# Altium PCB Control.PcbDoc
Units mm, origin at the board's own origin, x right, y up, seen from the top; angles counter-clockwise.
Board outline 70 x 100 mm, 2 copper layers (Top Layer, Bottom Layer); 47 components, 68 nets, 243 pads, 49 vias.
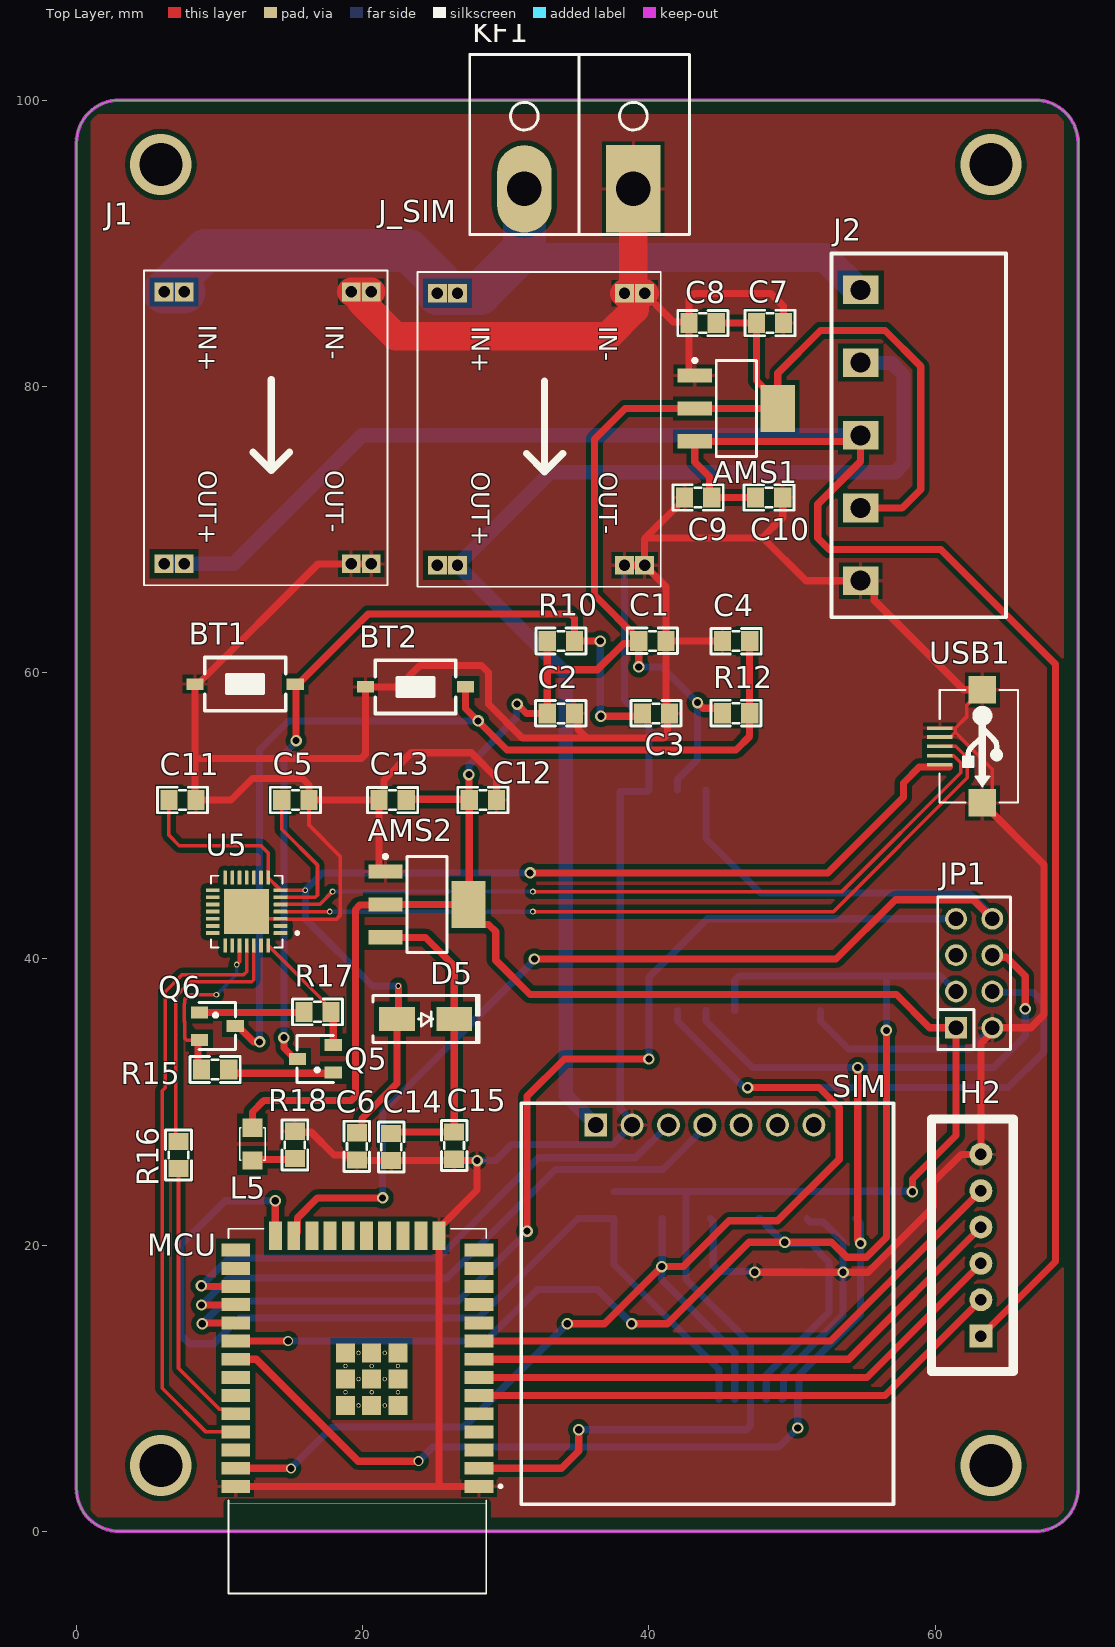
[diagram p0: Top Layer view]
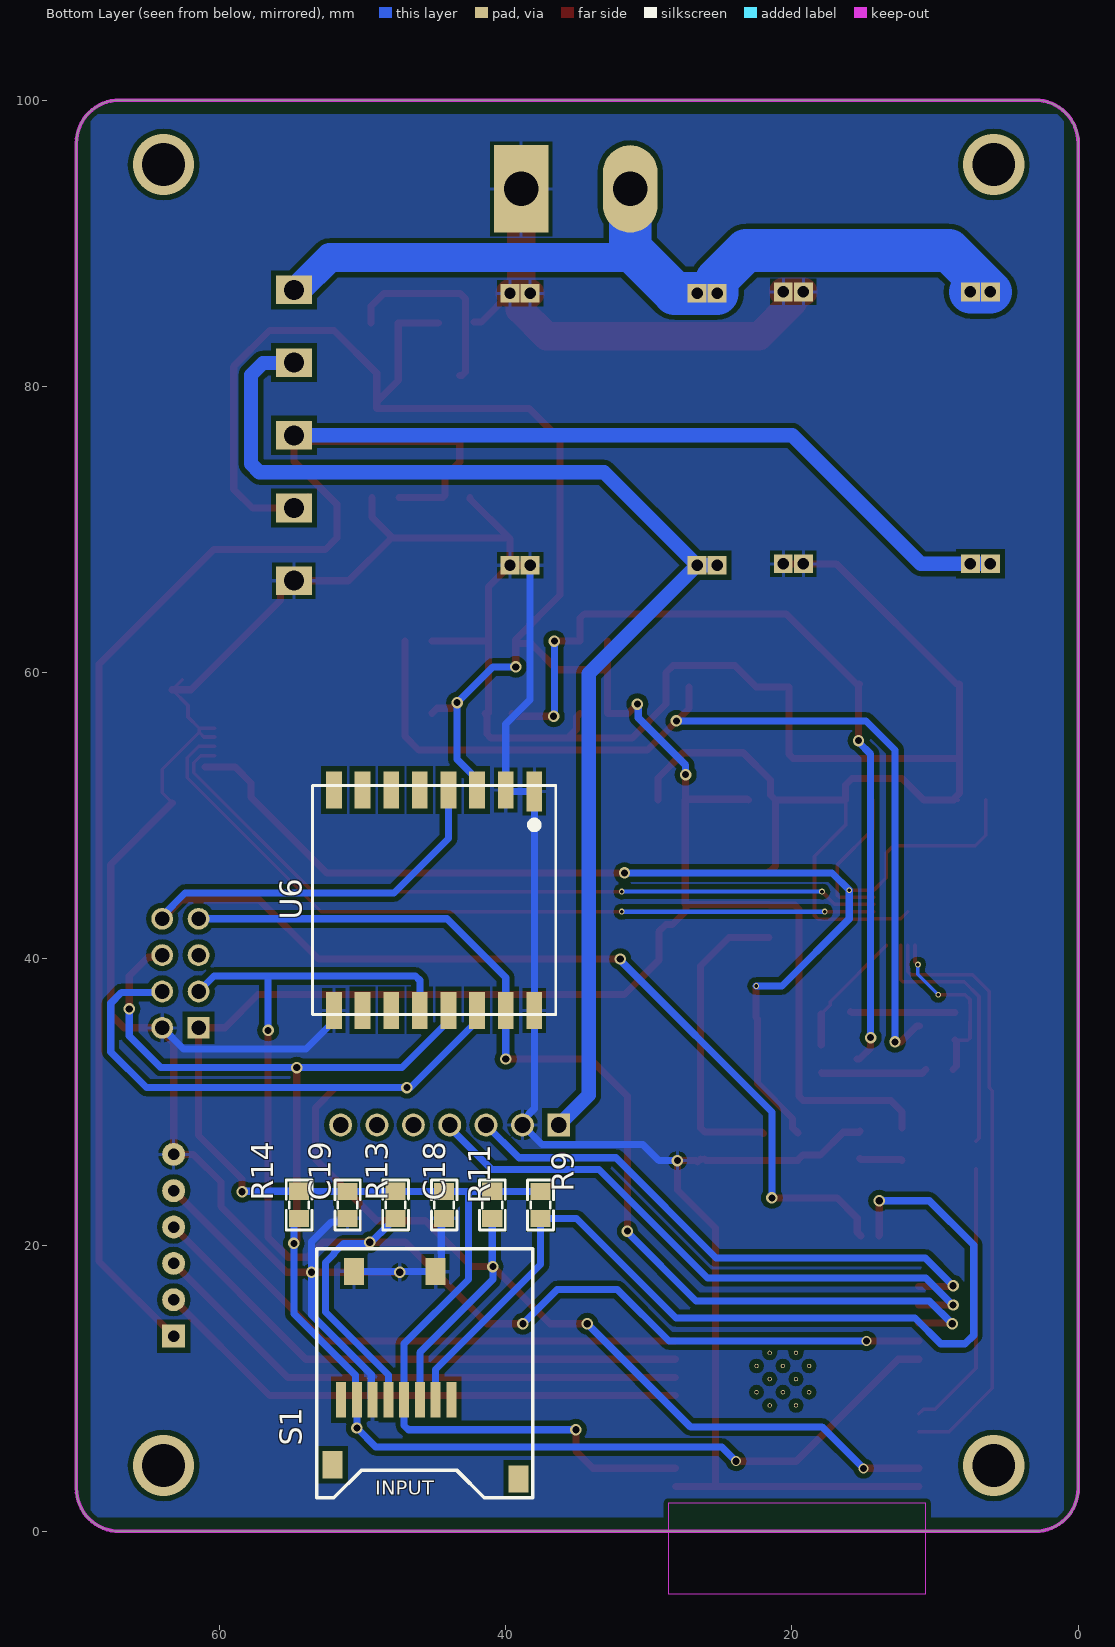
[diagram p1: Bottom Layer view, seen from below]

## Layer stack, top to bottom
Top Solder: solder mask 0.0102, Solder Resist, Dk 3.5
Top Layer: signal copper 0.0356
Dielectric 1: dielectric 0.32, FR-4, Dk 4.8
Bottom Layer: signal copper 0.0356
Bottom Solder: solder mask 0.0102, Solder Resist, Dk 3.5

## Board outline
0,3 ccw(c3,3) 3,0 67,0 ccw(c67,3) 70,3 70,97 ccw(c67,97) 67,100 3,100 ccw(c3,97) 0,97

## Design rules (kind name [scope] priority, off if disabled: settings)
Clearance [All] p1: gap=0.35 ignorepadtopadclearanceinfootprint=FALSE
PolygonConnect [All] p1: connectstyle=Relief reliefconductorwidth=0.254 reliefentries=4 polygonreliefangle="90 Angle" airgapwidth=0.254
RoutingVias [All] p1: holewidth=1.5 width=1.77 viastyle="Through Hole" minholewidth=1 minwidth=1.27 maxholewidth=2.5 maxwidth=2.7
SolderMaskExpansion [All] p1: expansion=0.102 istentingtop=FALSE
Width [All] p1: maxlimit=3 minlimit=0.2 preferedwidth=0.5
30 further rules are at their usual default settings.

## Classes and differential pairs
component class SIM: SIM
component class SD: C18 C19 R9 R11 R13 R14 S1
component class RF: JP1 U6
component class Power: AMS1 C7 C8 C9 C10 J1 J2 J_SIM KF1
component class MCU: AMS2 BT1 BT2 C1 C2 C3 C4 C5 C6 C11 C12 C13 C14 C15 D5 L5 MCU Q5 Q6 R10 R12 R15 R16 R17 R18 U5 USB1
component class Relay: H2

## Components (designator, comment, footprint, x,y, rotation, side; value= is the part's Value field where it differs from the comment)
AMS1 "AMS1117-3.3V" SOT223 46.112,78.457 r270 top value="AMS1117-3.3V SOT223"
AMS2 "AMS1117-3.3V" SOT223 24.5,43.8 r270 top value="AMS1117-3.3V SOT223"
BT1 "Nut Nhan 2 Chan SMD 3x6x2.5" "Nut Nhan 2 Chan SMD 3x6x2.5" 11.8,59.2 r180 top
BT2 "Nut Nhan 2 Chan SMD 3x6x2.5" "Nut Nhan 2 Chan SMD 3x6x2.5" 23.7,59 r180 top
C1 "104" "tu 0805" 40.246,62.215 r0 top
C2 "106" "tu 0805" 33.846,57.151 r0 top
C3 "106" "tu 0805" 40.5,57.151 r0 top
C4 "106" "tu 0805" 46.1,62.2 r180 top
C5 "105" "tu 0805" 15.3,51.1 r0 top
C6 "105" "tu 0805" 19.6,26.9 r270 top
C7 "106" "tu 0805" 48.46,84.429 r0 top
C8 "104" "tu 0805" 43.769,84.423 r180 top
C9 "106" "tu 0805" 43.445,72.234 r180 top
C10 "104" "tu 0805" 48.398,72.234 r0 top
C11 "105" "tu 0805" 7.413,51.1 r0 top
C12 "106" "tu 0805" 28.4,51.1 r0 top
C13 "104" "tu 0805" 22.1,51.093 r180 top
C14 "106" "tu 0805" 22.003,26.854 r270 top
C15 "104" "tu 0805" 26.403,26.954 r270 top
C18 "104" "tu 0805" 44.3,22.8 r270 bottom
C19 "104" "tu 0805" 51.049,22.8 r270 bottom
D5 "SS34" "DIODE SMA" 24.4,35.8 r0 top
H2 "Header 6P 2.54 Duc Thang" XH2.54M-6 63.2,13.64 r90 top
J1 "MP1584" DC-BRICK 4.73,88.1 r270 top
J2 "CON 5 EDG5.08" "CON 5 5EDG5.08" 54.8,86.74 r270 top
J_SIM "MP1584" DC-BRICK 23.83,88 r270 top
JP1 "JP 2x4 2.54" "JP 2x4 CT" 62.73,38.99 r90 top
KF1 "CON 2 KF7.62" "CON 2 KF7.62" 38.869,93.8 r180 top
L5 "LED 0805" LED-0805-Red 12.3,28.2 r270 top
MCU "ESP32 WROOM 32" ESP32-WROOM-32D 19.635,8.395 r180 top
Q5 "BC817" SOT-23 16.7,33 r90 top value=C9014
Q6 "BC817" SOT-23 9.85,35.305 r270 top value=C9014
R9 "1k" "tro smd 0805" 37.5,22.803 r270 bottom
R10 "10k" "tro smd 0805" 33.854,62.139 r180 top
R11 "1k" "tro smd 0805" 41.002,22.803 r90 bottom
R12 "10k" "tro smd 0805" 46.1,57.1 r180 top
R13 "1k" "tro smd 0805" 47.751,22.803 r90 bottom
R14 "1k" "tro smd 0805" 54.5,22.803 r90 bottom
R15 "10k" "tro smd 0805" 9.7,32.2 r180 top
R16 "470R" "Tro SMD 0805" 7.2,26.3 r270 top
R17 "10k" "tro smd 0805" 16.846,36.361 r0 top
R18 "10k" "tro smd 0805" 15.2,27 r90 top
S1 "Micro SD card TF5" "MicroSD TF V5" 48.3,9.254 r180 bottom
SIM "Module SIMA7670C" "Module sim7670C" 43.7,15.3 r180 top
U5 "CP2102" QFN50P500X500X100-29N 11.9,43.3 r180 top
U6 "RA-02" RA-02 45,44.1 r270 bottom
USB1 "USB Micro 5p SMD" "USB Micro 5p SMD" 60.332,54.85 r270 top

## Footprints (in the part's own frame and the unit in brackets; to place one, negate y for a bottom-side part, rotate by r counter-clockwise, add the part's x,y. Pads: shape width x height; smd on the part's side, far side on the other; paste and mask are expansions set on the pad)
"CON 2 KF7.62" [mil]
  rect 150x240 hole 95: 1(-2,0)
  oval 150x240 hole 95: 2(298,0)
  silkscreen extent -157,-370 448,126, body extent -152,-370 448,122, height 493
"CON 5 5EDG5.08" [mm]
  rect 2x2.5 hole 1.4: 1(0,0) 2(5.08,0) 3(10.16,0) 4(15.24,0) 5(20.32,0)
  silkscreen extent -2.54,-2.03 22.86,10.16, body extent -2.5,-1.75 22.82,10.25, height 3.15
DC-BRICK [mm]
  rect 1.308x1.308 / inner round 1.308 / far side rect 1.308x1.308 hole 0.8: IN1+(1.5,1.4) IN1-(1.5,14.47) IN2+(1.5,2.8) IN2-(1.5,15.87) OUT1+(20.5,1.4) OUT1-(20.5,14.47) OUT2+(20.5,2.8) OUT2-(20.5,15.87)
  silkscreen extent 0,0 22,17, body extent -2.45,-3 2.45,3, height 1.7
"DIODE SMA" [mm] "SMA"
  rect 2.5x1.7 smd: 1(-2,0) 2(2,0)
  silkscreen extent -3.68,-1.65 3.75,1.65, body extent -2.6,-1.37 2.6,1.37, height 2.4
ESP32-WROOM-32D [mm]
  rect 2x0.9 smd: 1(-8.5,5.26) 2(-8.5,3.99) 3(-8.5,2.72) 4(-8.5,1.45) 5(-8.5,0.18) 6(-8.5,-1.09) 7(-8.5,-2.36) 8(-8.5,-3.63) 9(-8.5,-4.9) 10(-8.5,-6.17) 11(-8.5,-7.44) 12(-8.5,-8.71) 13(-8.5,-9.98) 14(-8.5,-11.25) 25(8.5,-11.25) 26(8.5,-9.98) 27(8.5,-8.71) 28(8.5,-7.44) 29(8.5,-6.17) 30(8.5,-4.9) 31(8.5,-3.63) 32(8.5,-2.36) 33(8.5,-1.09) 34(8.5,0.18) 35(8.5,1.45) 36(8.5,2.72) 37(8.5,3.99) 38(8.5,5.26)
  rect 0.9x2 smd: 15(-5.715,-12.25) 16(-4.445,-12.25) 17(-3.175,-12.25) 18(-1.905,-12.25) 19(-0.635,-12.25) 20(0.635,-12.25) 21(1.905,-12.25) 22(3.175,-12.25) 23(4.445,-12.25) 24(5.715,-12.25)
  round 0.3 hole 0.2: 39(-2.835,-1.322) 39(-2.835,-3.157) 39(-1.917,-0.405) 39(-1.917,-4.075) 39(-1.917,-2.24) 39(-1,-1.322) 39(-1,-3.157) 39(-0.082,-0.405) 39(-0.082,-2.24) 39(-0.082,-4.075) 39(0.835,-1.322) 39(0.835,-3.157)
  rect 1.33x1.33 smd: 39(-2.835,-0.405) 39(-2.835,-4.075) 39(-2.835,-2.24) 39(-1,-0.405) 39(-1,-2.24) 39(-1,-4.075) 39(0.835,-0.405) 39(0.835,-2.24) 39(0.835,-4.075)
  Keep-Out Layer region: 9,6.45 -9,6.45 -9,12.75 9,12.75
  Keep-Out Layer region: 9,6.45 -9,6.45 -9,12.75 9,12.75
  silkscreen extent -10.1,-12.75 9,12.75, body extent -9,-12.62 9,12.88, height 3.2
"JP 2x4 CT" [mm] "8 pins, dual row, straight, gold plating"
  rect 1.52x1.52 hole 1.02: 1(-3.81,1.27)
  round 1.52 hole 1.02: 2(-1.27,1.27) 3(1.27,1.27) 4(3.81,1.27) 5(3.81,-1.27) 6(1.27,-1.27) 7(-1.27,-1.27) 8(-3.81,-1.27)
  silkscreen extent -5.33,-2.54 5.33,2.54, body extent -5.33,-2.54 5.33,2.54, height 8.51
LED-0805-Red [mil]
  rect 50x55 smd: 1(0,0) 2(90,0)
  silkscreen extent 0,-35 90,35, body extent 5,-25 85,25, height 43
"MicroSD TF V5" [mm]
  rect 1.4x1.9 smd: 0(-3.8,-4.6) 0(9.2,-5.6) 9(-2.3,8.9) 10(3.4,8.9)
  rect 0.7x2.5 smd: 1(4.5,-0.054) 2(3.4,-0.054) 3(2.3,-0.054) 4(1.2,-0.054) 5(0.1,-0.054) 6(-1,-0.054) 7(-2.1,-0.054) 8(-3.2,-0.054)
  silkscreen extent -4.9,-6.91 10.2,10.5, body extent -4.35,-5.54 9.75,9.66, height 2
"Module sim7670C" [mm]
  rect 1.6x1.6 hole 1.1: 1(7.408,-13.095)
  round 1.6 hole 1.1: 2(4.868,-13.095) 3(2.328,-13.095) 4(-0.212,-13.095) 5(-2.752,-13.095) 6(-5.292,-13.095) 7(-7.832,-13.095)
  silkscreen extent -13.39,-14.6 12.61,13.4, body extent -13.39,-14.6 12.61,13.4, height 12.24
"Nut Nhan 2 Chan SMD 3x6x2.5" [mm] "Switch SMD type"
  rect 1.2x0.8 smd: 1(-3.5,0) 2(3.5,0)
  silkscreen extent -2.82,-1.85 2.82,1.85, body extent -3.05,-1.85 3.05,1.85, height 2.5
QFN50P500X500X100-29N [mm]
  rrect25% 0.97x0.26 smd: 1(-2.37,1.5) 2(-2.37,1) 3(-2.37,0.5) 4(-2.37,0) 5(-2.37,-0.5) 6(-2.37,-1) 7(-2.37,-1.5) 15(2.37,-1.5) 16(2.37,-1) 17(2.37,-0.5) 18(2.37,0) 19(2.37,0.5) 20(2.37,1) 21(2.37,1.5)
  rrect25% 0.26x0.97 smd: 8(-1.5,-2.37) 9(-1,-2.37) 10(-0.5,-2.37) 11(0,-2.37) 12(0.5,-2.37) 13(1,-2.37) 14(1.5,-2.37) 22(1.5,2.37) 23(1,2.37) 24(0.5,2.37) 25(0,2.37) 26(-0.5,2.37) 27(-1,2.37) 28(-1.5,2.37)
  rect 3.15x3.15 smd paste-0.575: 29(0,0)
  silkscreen extent -3.64,-2.5 2.5,2.5
RA-02 [mm]
  rect 2.8x1.1 smd: 1(-7.6,7)
  rect 2.6x1.1 smd: 2(-7.7,5) 3(-7.7,3) 4(-7.7,1) 5(-7.7,-1) 6(-7.7,-3) 7(-7.7,-5) 8(-7.7,-7) 9(7.7,-7) 10(7.7,-5) 11(7.7,-3) 12(7.7,-1) 13(7.7,1) 14(7.7,3) 15(7.7,5) 16(7.7,7)
  silkscreen extent -8,-8.5 8,8.5
SOT223 [mm]
  rect 1x2.4 smd: 1(-2.3,-2.9) 2(0,-2.9) 3(2.3,-2.9)
  rect 3.3x2.4 smd: 4(0,2.9)
  silkscreen extent -3.47,-3.02 3.35,1.4, body extent -3.25,-3.56 3.25,3.4, height 1.68
SOT-23 [mm] "SOT 23 _ 1-3-2"
  rect 0.85x1.2 smd: 1(-0.94,-1.245) 2(0.985,-1.25) 3(0.005,1.25)
  silkscreen extent -1.65,-1.27 1.65,1.27, body extent -1.47,-1.33 1.53,1.17, height 1.06
"tro smd 0805" [mm]
  rect 1.2x1.4 smd: 1(-0.946,-0.061) 2(0.954,-0.061)
  silkscreen extent -1.75,-0.97 1.75,0.84, body extent -1.56,-0.76 1.44,0.64, height 0.53
"Tro SMD 0805" [mm]
  rect 1.2x1.4 smd: 1(-0.946,-0.061) 2(0.954,-0.061)
  silkscreen extent -1.75,-0.97 1.75,0.84, body extent -1.56,-0.76 1.44,0.64, height 0.53
"tu 0805" [mm] "Compoment SMD 80x50mil"
  rect 1.2x1.4 smd: 1(-0.946,-0.003) 2(0.954,-0.003)
  silkscreen extent -1.75,-0.89 1.75,0.89, body extent -1.01,-0.64 1.01,0.63, height 0.61
"USB Micro 5p SMD" [mil]
  rect 10x70 smd: 1(51.18,0) 2(25.59,0) 3(0,0) 4(-25.59,0) 5(-50,0)
  rect 74.8x74.8 smd: 5(-155.51,116.84) 5(155.51,116.84)
  silkscreen extent -155,-1 155,215, body extent -157,5 158,218, height 107
XH2.54M-6 [mm]
  rect 1.6x1.6 hole 0.8: 1(0,0)
  round 1.6 hole 0.8: 2(2.54,0) 3(5.08,0) 4(7.62,0) 5(10.16,0) 6(12.7,0)
  silkscreen extent -2.48,-2.26 15.18,3.46, body extent -2.48,-2.26 15.18,3.48, height 6.91

## Part data
AMS1 AMS2: library part "AMS1117 SMD", "Dán", Chung_Loai=Dán, Don_Vi=Con, Ma_Hang=MH000596
C1 C8 C10 C13 C15 C18 C19: library part "Tu 0805 104 50V 10%", "Dán", Chung_Loai=Dán, Don_Vi=Con, Ma_Hang=MH004551, So_Chan=2, Ten_Linh_Kien="Tụ 0805 104-100nF 10% 50V"
C2 C3 C4 C7 C9 C12 C14: library part "Tu 0805 106 16V 10%", "Dán", Chung_Loai=Dán, Don_Vi=Con, Ma_Hang=MH004553, So_Chan=2, Ten_Linh_Kien="Tụ 0805 106-10uF 10% 16V"
C5 C6 C11: library part "Tu 0805 105 50V 10%", "Dán", Chung_Loai=Dán, Don_Vi=Con, Ma_Hang=MH004552, So_Chan=2, Ten_Linh_Kien="Tụ 0805 105-1uF 10% 50V"
D5: library part "Diode SS34 ( 1N5822 )", "Dán", Chung_Loai=Dán, Don_Vi=Con, Ma_Hang=MH002104, Ten_Linh_Kien="Diode SS34 3A 40V SMA ( 1N5822 SS34A)"
H2 J2 KF1: "Cắm", Chung_Loai=Cắm, Don_Vi=Con
  H2: Ma_Hang=MH001972, Ten_Linh_Kien="Header 6P XH2.54-6P Đực Thẳng"
  J2: Ma_Hang=MH003589, Ten_Linh_Kien="CON 5 2EDG5.08-5P 5.08MM ( Xanh Cong)"
  KF1: Ma_Hang=MH002053, Ten_Linh_Kien="CON 2 KF7.62-2P 7.62MM (Đen Thẳng)"
J1 J_SIM: "Buck Switching Regulator IC Positive Adjustable 0.8V 1 Output 3A 8-SOIC (0.154, 3.90mm Width) Exposed Pad", Package="SOIC-8 Monolithic Power", Check_prices=https://www.snapeda.com/parts/MP1584/Monolithic+Power+Systems+Inc./view-part/?ref=eda, MF="Monolithic Power", MP=MP1584, SnapEDA_Link=https://www.snapeda.com/parts/MP1584/Monolithic+Power+Systems+Inc./view-part/?ref=snap
JP1: library part "JP 2x4 2.54 Cai Thang", "Cắm", Chung_Loai=Cắm, Don_Vi=Con, Ma_Hang=MH008647, Ten_Linh_Kien="Jump Đôi Cái 2.54MM 2x20P Thẳng"
L5: library part "LED 0805 Do", "Dán", Chung_Loai=Dán, Don_Vi=Con, Ma_Hang=MH000897, Ten_Linh_Kien="LED 0805 Màu Đỏ (Red)"
Q5 Q6: library part "Trans BC817", "SOT-23 - C8658"
R9 R11 R13 R14: library part "Tro 0805 1% 1k", "Dán", Chung_Loai=Dán, Don_Vi=Con, Ma_Hang=MH005468, So_Chan=2, Ten_Linh_Kien="Trở 0805 1% 1k"
R10 R12: library part "Tro 0805 5% 10k", "Dán", Chung_Loai=Dán, Don_Vi=Con, Ma_Hang=MH005239, So_Chan=2, Ten_Linh_Kien="Trở 0805 5% 10k"
R15 R17 R18: library part "Tro 0805 1% 10k", "Dán", Chung_Loai=Dán, Don_Vi=Con, Ma_Hang=MH005473, So_Chan=2, Ten_Linh_Kien="Trở 0805 1% 10k"
R16: library part "Tro 0805 5% 470R", "Dán", Chung_Loai=Dán, Don_Vi=Con, Ma_Hang=MH005341, So_Chan=2, Ten_Linh_Kien="Trở 0805 5% 470R"
U5: "CP2102N USB 2.0 to UART (RS232) Bridge Interface Evaluation Board", Package="WFQFN-20 Silicon Labs", Availability="In Stock", Check_prices=https://www.snapeda.com/parts/CP2102/Silicon+Labs/view-part/?ref=eda, MF="Silicon Labs", MP=CP2102, Price=None, Purchase-URL=https://pricing.snapeda.com/search/part/CP2102/?ref=eda, SnapEDA_Link=https://www.snapeda.com/parts/CP2102/Silicon+Labs/view-part/?ref=snap
U6: "General ISM < 1GHz LoRaâ„¢ Transceiver Module 410MHz ~ 525MHz Antenna Not Included, I-PEX Surface Mount", Package=None, Availability="Not in stock", Check_prices=https://www.snapeda.com/parts/RA-02/AI-Thinker/view-part/?ref=eda, MF=Ai-Thinker, MP=RA-02, Price=None, SnapEDA_Link=https://www.snapeda.com/parts/RA-02/AI-Thinker/view-part/?ref=snap
USB1: "USB Type B", Ma_Hang=MH001020, Ten="MicroUSB MK5P SMD"
BT1 BT2: Ma_Hang=MH001036, Ten="Nút Nhấn 2 Chân 3x6x2.5MM SMD"

## Via types
v1: diameter 0.8, hole 0.5, Top Layer to Bottom Layer, 34 vias
v2: diameter 0.4, hole 0.25, Top Layer to Bottom Layer, 8 vias
v3: diameter 4.27, hole 3, Top Layer to Bottom Layer, 4 vias
v4: diameter 0.7, hole 0.5, Top Layer to Bottom Layer, 3 vias

## Nets (pads, with @x,y where several pads share a name; then routed paths per layer and width w, separated by ;. In a path a pad name is that pad's centre, name@x,y a point inside that pad or via, vN(x,y) a via of type N, cw(c..) or ccw(c..) an arc to the next point about the centre after c; other vN are vias at no path point)
ACTIVE: U5.11
D_N: U5.5 USB1.2 | length 53.7
  Top Layer w0.25: U5.5 17,43.8 v2(17.9,44.7) ; v2(31.9,44.7) 53.5,44.7 61.8,53 61.8,53.7 61.302,54.198 60.334,54.198 USB1.2
  Bottom Layer w0.3: v2(17.9,44.7) v2(31.9,44.7)
D_P: U5.4 USB1.3 | length 55.5
  Top Layer w0.25: U5.4 v2(17.7,43.3) ; v2(31.9,43.3) 52.9,43.3 62.25,52.65 62.25,54.05 61.45,54.85 USB1.3
  Bottom Layer w0.3: v2(17.7,43.3) v2(31.9,43.3)
DTR: Q6.2 R15.2 U5.24 | length 12.5
  Top Layer w0.25: Q6.2 7.707,34.32 7.56,34.466 7.56,35.593 7.53,35.623 7.53,36.867 7.56,36.897 7.56,37.153 7.907,37.5 v2(9.786,37.5) ; v2(11.2,39.6) 11.4,39.8 U5.24
  Top Layer w0.5: Q6.2 8.5,34.22 8.5,32.506 R15.2
  Bottom Layer w0.25: v2(9.786,37.5) 11.2,38.914 v2(11.2,39.6)
EN: BT1.1 C3.1 Q5.3 R10.1 | length 60.4
  Top Layer w0.5: v1(14.5,34.5) 14.5,33.78 15.275,33.005 Q5.3 ; v1(15.35,55.25) 15.35,59.15 BT1.1 15.5,59.2 20.4,64.1 34.507,64.1 34.8,63.807 R10.1 v1(36.6,62.2) ; v1(36.65,56.95) 39.357,56.95 C3.1
  Bottom Layer w0.5: v1(14.5,34.5) 14.5,54.3 15.35,55.15 v1(15.35,55.25) ; v1(36.6,62.2) 36.6,57 v1(36.65,56.95)
GND: AMS1.1 AMS2.1 BT1.2 BT2.2 C1.2 C2.2 C3.2 C4.2 C5.2 C6.2 C7.2 C8.2 C9.2 C10.2 C11.2 C12.2 C13.2 C14.2 C15.2 C18.2 C19.2 H2.6 J1.IN1- J1.IN2- J1.OUT1- J1.OUT2- J2.5 J_SIM.IN1- J_SIM.IN2- J_SIM.OUT1- J_SIM.OUT2- JP1.8 KF1.1 MCU.1 MCU.15 MCU.38 R18.2 S1.6 S1.9 S1.10 SIM.2 U5.3 U5.29 U6.1 U6.2 U6.9 U6.16 USB1.4 USB1.5 | length 431.4
  Top Layer w0.25: C11.2 C11.2@8.668,51.097 ; U5.29 12.4,42.8 U5.3 14.275,42.795 14.694,42.795 14.714,42.775 18.175,42.775 18.425,43.025 18.425,47.175 16.254,49.346 C5.2 ; USB1.4 61.094,55.5 61.42,55.826 ; USB1.5@60.332,56.12 61.42,56.12 ; USB1.5@62.6,59.5 63.3,58.8 62.2,57.7 62.2,56.9 61.42,56.12 ; USB1.5@63.3,50.9 64,51.6 64,53.246 61.42,55.826 ; 61.42,55.826 61.42,56.12
  Top Layer w0.5: MCU.38 25.5,3.135 ; R18.2 15.333,27.882 16.418,27.882 18.004,26.296 19.247,26.296 C6.2 ; C6.2@19.597,25.9 C14.2 26,25.9 C15.2@26.1,26 ; J1.OUT2- J1.OUT1- 16.9,67.6 8.5,59.2 BT1.2 8.3,54 ; AMS2.1 21.521,46.1 21.146,46.475 C13.2 ; C15.2 26.6,25.8 26.7,25.9 v1(28,25.9) 28,23.845 25.35,21.195 MCU.15 25.35,3.285 25.5,3.135 ; MCU.1 25.5,3.135 ; C12.2 29.354,52.646 27.6,54.4 23.4,54.4 21.496,52.496 21.496,51.447 C13.2 ; C2.2 35.057,56.891 35.057,56.043 35.68,55.42 ; J_SIM.OUT1- J_SIM.OUT2- ; J_SIM.IN2- 41.7,84.5 42.2,84.5 ; C3.2 C3.2@41.353,57.047 ; C9.2 42.491,72.137 39.753,69.4 ; AMS1.1 43.065,80.757 42.815,81.007 C8.2 42.815,86.115 43.2,86.5 48.508,86.5 49.414,85.594 C7.2 ; C4.2 45.141,62.208 41.204,62.208 C1.2 ; v1(47.4,18.1) 53.5,18.1 55.316,18.1 59.9,22.684 59.9,24.4 61.84,26.34 H2.6 63.2,34.104 64,34.904 JP1.8 66.68,35.18 67.6,36.1 67.6,46.6 USB1.5@63.3,50.9 ; 47.95,69.45 50.98,66.42 54.995,66.42 55.745,65.67 55.745,65.055 62,58.8 USB1.5@63.3,58.8 ; C10.2 49.352,70.852 47.9,69.4 39.753,69.4 ; 8.3,54 8.3,51.564 8.668,51.197 8.668,51.097 10.797,51.097 12.3,52.6 15.8,52.6 16.254,52.146 C5.2 C13.2 ; 8.3,54 19.907,54 20.2,54.293 BT2.2 22.5,59 24,60.5 28.3,60.5 28.8,60 28.8,57.8 31.18,55.42 35.68,55.42 ; 35.68,55.42 41.007,55.42 41.3,55.713 41.3,56.993 C3.2@41.353,57.047 ; J_SIM.OUT2- 39.7,69.347 39.753,69.4 ; J_SIM.OUT2- 41.2,66 C1.2 ; C1.2 41.2,57.2 C3.2@41.353,57.047
  Top Layer w2: J1.IN1- J1.IN2- ; 19.9,85.9 22.3,83.5 37.128,83.5 39,85.372 39,85.8 J_SIM.IN1- ; J_SIM.IN1-@38.92,87.12 KF1.1 ; J_SIM.IN2-@39.2,86.5 J_SIM.IN2-
  Bottom Layer w0.5: v1(28,25.9) 29.3,25.9 30.425,27.025 37.462,27.025 SIM.2 38.832,28.693 38,29.525 U6.16 U6.1 39.9,51.7 U6.2 40,56.4 38.3,58.1 J_SIM.OUT1- ; C18.2 44.5,21.649 44.5,18.554 S1.10 S1.9 ; S1.6 49.4,9.3 49.4,10.962 53.57,15.132 v1(53.57,18.1) ; C19.2 51.282,21.616 52.184,21.616 53.57,20.23 53.57,18.239 v1@53.431,18.1 ; U6.9 52,35.65 53.95,33.7 62.52,33.7 JP1.8
IN1: H2.2 MCU.6 | length 37.8
  Top Layer w0.5: MCU.6 56.505,9.485 H2.2
IN2: H2.3 MCU.7 | length 38.4
  Top Layer w0.5: MCU.7 55.235,10.755 H2.3
IN3: H2.4 MCU.8 | length 38.9
  Top Layer w0.5: MCU.8 53.965,12.025 H2.4
IN4: H2.5 MCU.9 | length 39.4
  Top Layer w0.5: MCU.9 52.695,13.295 H2.5
IO0: BT2.1 C4.1 Q6.3 R12.1 | length 68.3
  Top Layer w0.5: Q6.3 11.275,35.3 12.375,34.2 v1(12.8,34.2) ; BT2.1 27.2,57.5 30.1,54.6 46.1,54.6 47.046,55.546 R12.1 C4.1
  Bottom Layer w0.5: v1(12.8,34.2) 12.8,54.6 14.825,56.625 v1(28.075,56.625)
JD_VCC: 
MISO: JP1.6 MCU.31 R14.1 S1.7 U6.13 | length 104.6
  Top Layer w0.5: MCU.31 12.575,12.025 19.7,4.9 v4(23.9,4.9) ; v1(54.6,32.4) 54.6,20.316 v1(54.8,20.116) ; JP1.6 64.148,40.112 64.988,40.112 66.3,38.8 v1(66.3,36.5)
  Bottom Layer w0.5: v4(23.9,4.9) 24.9,5.9 49.08,5.9 v1(50.4,7.22) S1.7 50.5,9.3 50.5,10.902 54.8,15.202 v1(54.8,20.116) 54.8,21.507 54.45,21.857 R14.1 ; U6.13 44,35.65 47.25,32.4 v1(54.6,32.4) 64.1,32.4 66.3,34.6 v1(66.3,36.5)
MOSI: JP1.7 MCU.37 R11.1 S1.3 U6.14 | length 113.3
  Top Layer w0.5: MCU.37 14.995,4.405 v4(15,4.4) ; v1(34.3,14.5) 36.9,14.5 v1(40.9,18.5) 42.4,18.5 45.6,21.7 49,21.7 53.3,26 53.3,29.6 51.9,31 v1(46.9,31)
  Bottom Layer w0.5: v4(15,4.4) 17.9,7.3 27.1,7.3 v1(34.3,14.5) ; v1(40.9,18.5) 40.9,17.6 46,12.5 S1.3 ; v1@40.941,18.333 R11.1 ; U6.14 42,35.65 46.65,31 65.1,31 67.6,33.5 67.6,36.9 66.858,37.642 64.078,37.642 JP1.7
NetAMS2_3: AMS2.3 C14.1 C15.1 D5.2 | length 21.5
  Top Layer w0.5: AMS2.3 24.4,41.5 26.4,39.5 D5.2 26.4,28.2 26.1,27.9 22.1,27.9 C14.1
NetC5_1: C5.1 U5.6 | length 10.3
  Top Layer w0.25: U5.6 16.7,44.3 16.846,44.446 16.846,46.554 14.354,49.046 C5.1
NetD1_1: 
NetD2_1: 
NetD3_1: 
NetD4_1: 
NetL1_1: 
NetL2_1: 
NetL3_1: 
NetL4_1: 
NetL5_2: L5.2 R18.1 | length 3
  Top Layer w0.5: L5.2 12.37,25.984 15.191,25.984 R18.1
NetMCU_33: MCU.33
NetMCU_36: MCU.36
NetP1_1: 
NetP1_2: 
NetP1_3: 
NetP2_1: 
NetP2_2: 
NetP2_3: 
NetP3_1: 
NetP3_2: 
NetP3_3: 
NetP4_1: 
NetP4_2: 
NetP4_3: 
NetQ1_1: 
NetQ2_1: 
NetQ3_1: 
NetQ4_1: 
NetQ5_1: Q5.1 R15.1 | length 7.4
  Top Layer w0.5: R15.1 10.896,32.01 17.895,32.01 Q5.1
NetQ6_1: Q6.1 R17.1 | length 7.3
  Top Layer w0.5: Q6.1 15.845,36.245 R17.1
NetR1_1: 
NetR2_1: 
NetR3_1: 
NetR4_1: 
NetR5_1: 
NetR6_1: 
NetR7_1: 
NetR8_1: 
NetR16_1: R16.1 U5.26 | length 18.6
  Top Layer w0.25: R16.1 6.93,27.454 6.93,37.372 7.959,38.4 12.259,38.4 12.405,38.546 U5.26@12.405,40.93
NSS: JP1.4 MCU.29 U6.15 | length 75.7
  Top Layer w0.5: v1(8.799,14.499) 8.865,14.565 MCU.29 ; v1(31.494,20.972) 31.494,30.394 34.1,33 v1(40,33)
  Bottom Layer w0.5: v1(8.799,14.499) 10.4,16.1 26.7,16.1 31.494,20.894 v1(31.494,20.972) ; v1(40,33) U6.15 40,38.7 44.1,42.8 JP1.4
RST: JP1.5 MCU.23 U6.4 | length 89.1
  Top Layer w0.5: MCU.23 15.44,20.895 15.44,21.881 16.859,23.3 v1(21.4,23.3) ; v1(32,39.988) 53.088,39.988 57.23,44.13 62.67,44.13 JP1.5
  Bottom Layer w0.5: v1(21.4,23.3) 21.4,29.3 32,39.9 v1(32,39.988) ; U6.4 44,48.4 47.8,44.6 62.4,44.6 64,43 JP1.5
RTS: Q5.2 R17.2 U5.28 | length 8.8
  Top Layer w0.25: U5.28 17.325,37.005 17.325,36.775 R17.2 R17.2@17.95,36.15
  Top Layer w0.5: Q5.2 R17.2@17.95,36.15
RX2: MCU.27 SIM.3 | length 39.7
  Top Layer w0.5: v1(8.74,17.16) 8.75,17.16 8.805,17.105 MCU.27
  Bottom Layer w0.5: v1(8.74,17.16) 10.681,19.1 25.3,19.1 32.3,26.1 39.076,26.1 SIM.3
SCK: JP1.2 MCU.30 R13.1 S1.5 U6.12 | length 105.3
  Top Layer w0.5: MCU.30 14.695,13.295 v4@14.7,13.3 ; v1(38.8,14.5) 41.3,14.5 47,20.2 v1(49.5,20.2) 52.772,20.2 53.826,19.146 55.202,19.146 56.6,20.544 v1(56.6,35)
  Bottom Layer w0.5: v4(14.8,13.3) 28.6,13.3 32.2,16.9 36.4,16.9 v1(38.8,14.5) ; U6.12 46,38.5 46.3,38.8 56.7,38.8 ; R13.1 47.79,21.857 48.14,21.507 48.14,21.46 49.5,20.1 51.338,20.1 52,19.438 52,19.383 52.6,18.783 52.6,15.321 48.2,10.921 S1.5 ; v1(56.6,35) 56.6,38.7 56.7,38.8 ; JP1.2 60.38,38.8 56.7,38.8
SDCS: MCU.24 R9.2 S1.2 | length 66.5
  Top Layer w0.5: v1(13.9,23.1) 13.9,20.665 MCU.24
  Bottom Layer w0.5: v1(13.9,23.1) 10.4,23.1 7.3,20 7.3,13.7 7.9,13.1 9.6,13.1 11.4,14.9 28.1,14.9 35.048,21.848 R9.2 37.561,18.639 44.9,11.3 S1.2
TX2: MCU.28 SIM.4 | length 42.9
  Top Layer w0.5: v1(8.743,15.815) 8.747,15.819 11.119,15.819 MCU.28
  Bottom Layer w0.5: v1(8.743,15.815) 8.767,15.815 10.653,17.7 25.9,17.7 33.48,25.28 40.98,25.28 43.912,28.212 SIM.4
U0RX: MCU.34 R16.2 | length 19.3
  Top Layer w0.25: R16.2 7.139,11.401 10.001,8.54 10.81,8.54 MCU.34
U0TX: MCU.35 U5.25 | length 42.3
  Top Layer w0.25: MCU.35 9.055,6.945 5.994,10.006 5.994,30.778 6.2,30.984 6.2,37.7 7.4,38.9 11.7,38.9 11.9,39.1 U5.25
V_SIM_7V: J2.2 J_SIM.OUT1+ J_SIM.OUT2+ SIM.1 | length 88.2
  Bottom Layer w1: J_SIM.OUT1+ J_SIM.OUT2+ ; SIM.1 34.2,30.487 34.2,59.93 J_SIM.OUT2+ ; J2.2 54.824,81.636 56.964,81.636 57.8,80.8 57.8,74.586 57.214,74 33.13,74 26.784,67.654 J_SIM.OUT2+
VCC: AMS1.3 C9.1 C10.1 H2.1 J1.OUT1+ J1.OUT2+ J2.3 | length 149.4
  Top Layer w0.5: C10.1 47.449,72.234 44.394,72.234 C9.1 44.236,72.392 44.236,73.687 43.212,74.711 AMS1.3 54.377,76.157 J2.3 54.8,74.765 51.8,71.765 51.8,69.4 52.6,68.6 60.4,68.6 68.42,60.58 68.42,18.86 H2.1
  Bottom Layer w1: J1.OUT1+ J1.OUT2+ 11,67.6 19.98,76.58 J2.3
VCC_3V3PW: AMS1.2 AMS1.4 AMS2.2 AMS2.4 C1.1 C2.1 C7.1 C8.1 C12.1 C13.1 C18.1 C19.1 J2.4 JP1.1 L5.1 MCU.2 R9.1 R10.2 R11.2 R12.2 R13.2 R14.2 S1.4 U6.3 | length 259.3
  Top Layer w0.5: L5.1 12.3,29.3 13.1,30.1 19.207,30.1 19.5,30.393 19.5,43.457 19.793,43.75 21.55,43.75 AMS2.2 AMS2.4 ; C13.1 23.097,51.148 27.348,51.148 27.427,51.227 v1(27.427,52.873) ; C12.1 27.454,43.854 AMS2.4 ; MCU.2 33.895,4.405 35.1,5.61 v1(35.1,7.1) ; v1(30.8,57.8) 31.453,57.147 C2.1 32.9,60.2 ; R10.2 32.9,60.2 ; v1(39.3,60.4) C1.1 ; v1(43.4,57.9) 43.796,57.504 44.802,57.504 R12.2 ; C8.1 C7.1 47.514,80.405 AMS1.4@49.012,78.907 ; J2.4@53.8,72.25 54.55,71.5 J2.4 57.7,71.5 59,72.8 59,81.4 56.5,83.9 52,83.9 49.012,80.912 AMS1.4@49.012,78.907 ; v1(58.418,23.721) 58.418,24.618 61.46,27.66 JP1.1 59.62,35.18 57.3,37.5 31.7,37.5 29.3,39.9 29.3,41.9 28.8,42.4 28.35,42.4 27.4,43.35 AMS2.4 ; 32.9,60.2 36.4,60.2 38.243,62.043 39.131,62.043 C1.1 ; C1.1 39.3,62.312 36.2,65.412 36.2,76.3 38.357,78.457 AMS1.2 AMS1.4 AMS1.4@49.012,78.907
  Bottom Layer w0.5: v1(27.427,52.873) 27.427,53.527 30.743,56.843 30.743,57.743 v1(30.8,57.8) ; v1(35.1,7.1) 46.8,7.1 47.1,7.4 S1.4 47.1,11.2 47.1,13.1 42.6,17.6 42.6,23.753 ; R9.1 37.565,23.753 42.6,23.753 ; v1(39.3,60.4) 40.9,60.4 v1(43.4,57.9) 43.4,53.95 42,52.55 U6.3 ; v1(58.418,23.721) 58.382,23.757 R14.2 54.435,23.753 42.6,23.753
VCC_12VDC: J1.IN1+ J1.IN2+ J2.1 J_SIM.IN1+ J_SIM.IN2+ KF1.2 | length 60.1
  Bottom Layer w0.5: J2.1@54.55,86.74 J2.1
  Bottom Layer w2: 30.7,89 52.29,89 J2.1@54.55,86.74
  Bottom Layer w3: J1.IN2+ J1.IN1+ 9.03,89.5 23.2,89.5 25.23,87.47 J_SIM.IN1+ J_SIM.IN2+ 28.2,86.5 31.299,89.599 KF1.2
VDDUSB: C6.1 C11.1 D5.1 U5.7 U5.8 USB1.1 | length 85.5
  Top Layer w0.25: C11.1 6.468,48.632 7.2,47.9 12.9,47.9 13.4,47.4 U5.8 U5.7@14.195,44.875 ; U5.7 v2(16,44.8)
  Top Layer w0.5: C6.1 19.601,27.846 19.951,28.196 19.951,28.851 22.4,31.3 D5.1 22.5,35.9 v2(22.5,38.1) ; v1(31.7,46) 52.5,46 57.796,51.296 57.796,52.296 58.9,53.4 61,53.4
  Bottom Layer w0.5: v2(22.5,38.1) 20.7,38.1 16,42.8 v2(16,44.8) 17.2,46 v1(31.7,46)
pads on no net: JP1.3 MCU.3 MCU.4 MCU.5 MCU.10 MCU.11 MCU.12 MCU.13 MCU.14 MCU.16 MCU.17 MCU.18 MCU.19 MCU.20 MCU.21 MCU.22 MCU.25 MCU.26 MCU.32 MCU.39 S1.0 S1.1 S1.8 SIM.5 SIM.6 SIM.7 U5.1 U5.2 U5.9 U5.10 U5.12 U5.13 U5.14 U5.15 U5.16 U5.17 U5.18 U5.19 U5.20 U5.21 U5.22 U5.23 U5.27 U6.5 U6.6 U6.7 U6.8 U6.10 U6.11
copper on no net:
  other v3: 5.9,4.6 63.9,4.6 5.9,95.5 63.9,95.5

## Polygon pours and split planes (outlines as drawn)
GND on Bottom Layer "GND_L02_P000" (solid, pour order 0): 1,99 1,1 69,1 69,99
GND on Top Layer "GND_L01_P001" (solid, pour order 1): 1,99 1,1 69,1 69,99

## Keep-outs
Keep-Out Layer:
  the board outline again, w0.254

## Text inside footprints (layer, text, board x,y; h text height)
J1: Top Overlay "IN+" at 8.54,84.29 h1.27 r270; Top Overlay "IN-" at 17.43,84.29 h1.27 r270; Top Overlay "OUT+" at 8.54,74.13 h1.27 r270; Top Overlay "OUT-" at 17.43,74.13 h1.27 r270
J_SIM: Top Overlay "IN+" at 27.64,84.19 h1.27 r270; Top Overlay "IN-" at 36.53,84.19 h1.27 r270; Top Overlay "OUT+" at 27.64,74.03 h1.27 r270; Top Overlay "OUT-" at 36.53,74.03 h1.27 r270
MCU: Mechanical 13 "ANTENNA" at 25.635,-0.605 h1.78 r180
S1: Bottom Overlay "INPUT" at 49.1,2.554 h1